# EAGLE board USB-C_PURE_v1 (EAGLE 9.7.0)

Size 60.4 x 149.8 mm. Coordinates in mm from the lower left corner, seen from the top.
Outline: 29.53,79.07 29.53,79.53 29.98,79.53 29.98,79.07 29.53,79.07
Outline: 30.62,79.07 30.62,79.53 31.08,79.53 31.08,79.07 30.62,79.07
Outline: 31.73,79.07 31.73,79.53 32.18,79.53 32.18,79.07 31.73,79.07
Outline: 53.8,84.6 53.8,86 56,86 56,84.6 53.8,84.6
Outline: 32.85,79.07 32.85,79.53 33.45,79.53 33.45,79.07 32.85,79.07
Outline: 27.15,79.07 27.15,79.53 27.75,79.53 27.75,79.07 27.15,79.07
Outline: 53.8,61.7 53.8,63.1 56,63.1 56,61.7 53.8,61.7
Outline: 38.7,63.27 38.7,63.72 39.16,63.72 39.16,63.27 38.7,63.27
Outline: 34.13,63.27 34.13,63.72 34.73,63.72 34.73,63.27 34.13,63.27
Outline: 39.83,61.87 39.83,62.32 40.43,62.32 40.43,61.87 39.83,61.87
Outline: 37.61,63.27 37.61,63.72 38.05,63.72 38.05,63.27 37.61,63.27
Outline: 41.08,61.87 41.08,62.32 41.68,62.32 41.68,61.87 41.08,61.87
Outline: 37.78,54.71 37.78,55.31 38.78,55.31 38.78,54.71 37.78,54.71
Outline: 39.83,63.27 39.83,63.72 40.43,63.72 40.43,63.27 39.83,63.27
Outline: 33.18,54.71 33.18,55.31 34.38,55.31 34.38,54.71 33.18,54.71
Outline: 32.88,61.87 32.88,62.32 33.48,62.32 33.48,61.87 32.88,61.87
Outline: 30.58,57.47 30.58,59.32 31.18,59.32 31.18,57.47 30.58,57.47
Outline: 36.51,63.27 36.51,63.72 36.95,63.72 36.95,63.27 36.51,63.27
Outline: 40.18,54.71 40.18,55.31 41.38,55.31 41.38,54.71 40.18,54.71
Outline: 37.61,61.87 37.61,62.32 38.05,62.32 38.05,61.87 37.61,61.87
Outline: 35.41,61.87 35.41,62.32 35.86,62.32 35.86,61.87 35.41,61.87
Outline: 41.08,63.27 41.08,63.72 41.68,63.72 41.68,63.27 41.08,63.27
Outline: 35.78,54.71 35.78,55.31 36.78,55.31 36.78,54.71 35.78,54.71
Outline: 36.4,73.28 36.4,75.12 37,75.12 37,73.28 36.4,73.28
Outline: 34.13,61.87 34.13,62.32 34.73,62.32 34.73,61.87 34.13,61.87
Outline: 36.51,61.87 36.51,62.32 36.95,62.32 36.95,61.87 36.51,61.87
Outline: 43.38,57.47 43.38,59.32 43.98,59.32 43.98,57.47 43.38,57.47
Outline: 34.1,79.07 34.1,79.53 34.7,79.53 34.7,79.07 34.1,79.07
Outline: 26.2,70.52 26.2,71.12 27.4,71.12 27.4,70.52 26.2,70.52
Outline: 25.9,77.67 25.9,78.12 26.5,78.12 26.5,77.67 25.9,77.67
Outline: 30.8,70.52 30.8,71.12 31.8,71.12 31.8,70.52 30.8,70.52
Outline: 23.6,73.28 23.6,75.12 24.2,75.12 24.2,73.28 23.6,73.28
Outline: 28.8,70.52 28.8,71.12 29.8,71.12 29.8,70.52 28.8,70.52
Outline: 33.2,70.52 33.2,71.12 34.4,71.12 34.4,70.52 33.2,70.52
Outline: 32.88,63.27 32.88,63.72 33.48,63.72 33.48,63.27 32.88,63.27
Outline: 25.9,79.07 25.9,79.53 26.5,79.53 26.5,79.07 25.9,79.07
Outline: 32.85,77.67 32.85,78.12 33.45,78.12 33.45,77.67 32.85,77.67
Outline: 34.1,77.67 34.1,78.12 34.7,78.12 34.7,77.67 34.1,77.67
Outline: 28.43,77.67 28.43,78.12 28.88,78.12 28.88,77.67 28.43,77.67
Outline: 30.62,77.67 30.62,78.12 31.08,78.12 31.08,77.67 30.62,77.67
Outline: 27.15,77.67 27.15,78.12 27.75,78.12 27.75,77.67 27.15,77.67
Outline: 29.53,77.67 29.53,78.12 29.98,78.12 29.98,77.67 29.53,77.67
Outline: 0.4,119.8 0,30 arc180 60,30 60.4,119.8 arc180 0.4,119.8
Outline: circle at 30.1,12.2 radius 1.4
Outline: circle at 30.1,139.2 radius 1.4
Copper layers (1*16): Top 0.035mm / dielectric 1.5mm / Bottom 0.035mm
Design rules "default": minimum track width 6mil, minimum drill 0.35mm, track to track 6mil, track to pad 6mil, pad to pad 6mil, via to via 6mil, smd to smd 6mil, copper to edge 40mil, drill to drill 6mil, minimum pad ring 10mil, minimum via ring 8mil, stop-mask expansion 4mil, vias tented up to drill 0mil, thermal gap 10mil
Net classes: 1 power: width 0.305 mm, drill 0.483 mm, clearance 0.203 mm; 2 gnd: width 0.305 mm, drill 0.483 mm, clearance 0.203 mm; 3 usbvcc: width 0.305 mm, drill 0.483 mm, clearance 0.203 mm; 4 aref: width 0.254 mm, drill 0.483 mm, clearance 0.203 mm

## Footprints (pad centres in the part's own frame; a part is rotated, then mirrored left to right if it is on the bottom)
54 = drill 1.83 pad 2.75: 1 3.3,2.54; 2 3.3,-2.54; 3 -4.32,0; 4 46.77,-2.54; 5 46.77,2.54; 6 54.39,0
254TR = drill 1.85 pad 4.24: 1 0,0 | drill 1.85 pad 5.2: 2 16,0
CAPC2012X110 = smd 1.165 x 1.465: 1 -0.875,0; 2 0.875,0
CAPC1005X60 = smd 0.56 x 0.629: 1 -0.485,0; 2 0.485,0
CAP_16SVPG270M = smd 3.5 x 1.6: 1 -2.8,0; 2 2.8,0
LEDC2012X105N_RND-R = smd 0.862 x 1.362: A 0.975,0; C -0.975,0
DPY2_TEX = smd 0.3 x 0.55: 1 -0.35,0; 2 0.35,0
SMA_DIO = smd 2.18 x 1.63: 1 -1.857,0; 2 1.857,0
2X3-NS = drill 1.016 pad 1.88: 1 -2.54,-1.27; 2 -2.54,1.27; 3 0,-1.27; 4 0,1.27; 5 2.54,-1.27; 6 2.54,1.27
ADAMTECH_USB-C31-A-D-VT-CS1 = drill 0.45 pad 0.85 square: CC1 -1.65,5.1; CC2 1.65,3.7; D+_A -0.55,5.1; D+_B 0.55,3.7; D-_A 0.55,5.1; D-_B -0.55,3.7 | drill 0.6 pad 0.9 long: D+ 1,-3.38; D- -1,-3.38 | drill 0.6 pad 1.05 long: G 3.5,-3.38; V -3.5,-3.38 | drill 0.45 pad 1 square: G_A1 -4.1,5.1; G_A2 4.1,5.1; G_B1 4.1,3.7; G_B2 -4.1,3.7; V_A1 -2.85,5.1; V_A2 2.85,5.1; V_B1 2.85,3.7; V_B2 -2.85,3.7 | drill 0.6 pad 1.25 long: S1 -6.4,0; S2 6.4,0
SAMTEC-SLW-104-01-X-S = drill 0.86 pad 1.46: 1 -3.81,0; 2 -1.27,0; 3 1.27,0; 4 3.81,0
DR1050 = smd 3.302 x 3.302: 1 -5.309,0; 2 5.309,0
AA2810 = smd 1.27 x 0.635: + -1.27,0; - 1.27,0
EAPL3809WA1 = smd 0.635 x 1.27: + 0,0; - 3.81,0
STANDOFF_HEX_MALE-FEMALE_550X1200_M3X0.5_MTGP850H320 = drill 3.2 pad 8.5: 1 0,0 | hole 3.2: 0,0
SOT96P240X120-3N = smd 1.2 x 0.65: 1 -1.05,0.96; 2 -1.05,-0.96; 3 1.05,0
SOIC127P600X175-8N = smd 1.525 x 0.7: 1 -2.712,1.905; 2 -2.712,0.635; 3 -2.712,-0.635; 4 -2.712,-1.905; 5 2.712,-1.905; 6 2.712,-0.635; 7 2.712,0.635; 8 2.712,1.905
RESC1005X40 = smd 0.535 x 0.644: 1 -0.507,0; 2 0.507,0
BTN_KMR2_4.6X2.8 = smd 0.9 x 1: A 2.05,0.8; A' -2.05,0.8; B 2.05,-0.8; B' -2.05,-0.8
THRMC1608X60N = smd 0.799 x 0.974: 1 -0.815,0; 2 0.815,0
PAD.03X.03 = smd 0.762 x 0.762: P$1 0,0
1X07 = drill 1.016 long: 1 -7.62,0; 2 -5.08,0; 3 -2.54,0; 4 0,0; 5 2.54,0; 6 5.08,0; 7 7.62,0
MP2639AGRZ = smd 1.8 x 0.3: 1 -1.4,1.1; 2 -1.4,0.55; 3 -1.4,0; 4 -1.4,-0.55; 5 -1.4,-1.1 | smd 0.3 x 0.7: 6 -1.3,-1.95; 12 1.3,-1.95; 20 1.3,1.95; 26 -1.3,1.95 | smd 0.2 x 0.7: 7 -0.8,-1.95; 8 -0.4,-1.95; 9 0,-1.95; 10 0.4,-1.95; 11 0.8,-1.95; 21 0.8,1.95; 22 0.4,1.95; 23 0,1.95; 24 -0.4,1.95; 25 -0.8,1.95 | smd 1.05 x 0.2: 13 1.775,-1.2; 14 1.775,-0.8; 15 1.775,-0.4; 16 1.775,0; 17 1.775,0.4; 18 1.775,0.8; 19 1.775,1.2
MLF32-TH = smd 0.7 x 0.25: 1 -2.35,1.75; 2 -2.35,1.25; 3 -2.35,0.75; 4 -2.35,0.25; 5 -2.35,-0.25; 6 -2.35,-0.75; 7 -2.35,-1.25; 8 -2.35,-1.75; 17 2.35,-1.75; 18 2.35,-1.25; 19 2.35,-0.75; 20 2.35,-0.25; 21 2.35,0.25; 22 2.35,0.75; 23 2.35,1.25; 24 2.35,1.75 | smd 0.25 x 0.7: 9 -1.75,-2.35; 10 -1.25,-2.35; 11 -0.75,-2.35; 12 -0.25,-2.35; 13 0.25,-2.35; 14 0.75,-2.35; 15 1.25,-2.35; 16 1.75,-2.35; 25 1.75,2.35; 26 1.25,2.35; 27 0.75,2.35; 28 0.25,2.35; 29 -0.25,2.35; 30 -0.75,2.35; 31 -1.25,2.35; 32 -1.75,2.35 | smd 3.2 x 3.2: TH 0,0
DBV6_TEX = smd 0.978 x 0.559: 1 -1.365,0.95; 2 -1.365,0; 3 -1.365,-0.95; 4 1.365,-0.95; 5 1.365,0; 6 1.365,0.95
SOT-25_TOR = smd 0.927 x 0.432: 1 -1.289,0.95; 2 -1.289,0; 3 -1.289,-0.95; 4 1.289,-0.95; 5 1.289,0.95
DMX3_TEX = smd 0.25 x 0.453: 1 0,0.252; 2 -0.34,-0.252; 3 0.34,-0.252
21-100355_MXM = smd 0.25 x 0.25: A1 -1.5,1.5; A2 -1,1.5; A3 -0.5,1.5; A4 0,1.5; A5 0.5,1.5; A6 1,1.5; A7 1.5,1.5; B1 -1.5,1; B2 -1,1; B3 -0.5,1; B4 0,1; B5 0.5,1; B6 1,1; B7 1.5,1; C1 -1.5,0.5; C2 -1,0.5; C3 -0.5,0.5; C4 0,0.5; C5 0.5,0.5; C6 1,0.5; C7 1.5,0.5; D1 -1.5,0; D2 -1,0; D3 -0.5,0; D4 0,0; D5 0.5,0; D6 1,0; D7 1.5,0; E1 -1.5,-0.5; E2 -1,-0.5; E3 -0.5,-0.5; E4 0,-0.5; E5 0.5,-0.5; E6 1,-0.5; E7 1.5,-0.5; F1 -1.5,-1; F2 -1,-1; F3 -0.5,-1; F4 0,-1; F5 0.5,-1; F6 1,-1; F7 1.5,-1; G1 -1.5,-1.5; G2 -1,-1.5; G3 -0.5,-1.5; G4 0,-1.5; G5 0.5,-1.5; G6 1,-1.5; G7 1.5,-1.5
OSC_CSTNE16M0V530000R0 = smd 0.4 x 1.9: 1 -1.2,0; 2 0,0; 3 1.2,0

## Placement (x,y rotation side)
BT1  54  [54]  26.5,11.6 90 top
BT2  54  [54]  26.3,88.5 90 top
BT3  54  [54]  47.8,83.5 90 top
BT4  54  [54]  47.9,15.1 90 top
BT5  254TR  [254TR]  82.2,105.7 0 top  (outside the outline)
BT6  254TR  [254TR]  82.2,86.9 0 top  (outside the outline)
BT7  254TR  [254TR]  82.2,68.1 0 top  (outside the outline)
BT8  254TR  [254TR]  82.2,49.3 0 top  (outside the outline)
BT9  254TR  [254TR]  82.2,30.5 0 top  (outside the outline)
BT10  254TR  [254TR]  82.2,11.7 0 top  (outside the outline)
BT11  254TR  [254TR]  95.3,0 270 top  (outside the outline)
BT12  254TR  [254TR]  82.2,-25.9 0 top  (outside the outline)
C1  1uF  [CAPC2012X110]  28.2,100.2 0 top
C2  22uF  [CAPC2012X110]  31.1,110.2 0 top
C3  22uF  [CAPC2012X110]  31,104.9 0 top
C4  1uF  [CAPC2012X110]  30.52,53.37 0 bottom
C5  22uF  [CAPC2012X110]  42.7,74 270 bottom
C6  22uF  [CAPC2012X110]  12.2,56.1 0 top
C7  22uF  [CAPC2012X110]  24.4,96 0 top
C8  100nF  [CAPC1005X60]  38.6,119 0 bottom
C9  1uF  [CAPC2012X110]  31.1,114.7 0 top
C11  33pF  [CAPC1005X60]  32.3,124.2 180 bottom
C12  CNTC  [CAPC1005X60]  32.3,128.4 180 bottom
C14  22uF  [CAPC2012X110]  45.9,125.4 0 top
C15  22uF  [CAPC2012X110]  45.9,121 0 top
C17  1uF  [CAPC2012X110]  31.7,34.7 0 top
C18  100nF  [CAPC1005X60]  13.7,70.1 180 bottom
C19  100nF  [CAPC1005X60]  9.4,74.4 180 bottom
C21  1uF  [CAPC2012X110]  44.33,77.22 90 bottom
C23  100nF  [CAPC1005X60]  14.2,78.4 180 bottom
C24  100nF  [CAPC1005X60]  15.7,70.1 180 bottom
C52  270uF  [CAP_16SVPG270M]  12.7,49.4 180 top
CIB  33pF  [CAPC1005X60]  34.2,129.7 270 bottom
CTMR  1uF  [CAPC2012X110]  35.9,118.1 90 bottom
D1  LED_RED  [LEDC2012X105N_RND-R]  14.1,123.6 90 top
D2  TPD1E10B06QDPYRQ1DPY2_TEX  [DPY2_TEX]  20.8,78.7 90 bottom
D3  TPD1E10B06QDPYRQ1DPY2_TEX  [DPY2_TEX]  30.7,73 180 top
D4  B330A-13SMA_DIO  [SMA_DIO]  44.2,132.1 0 bottom
ISP  AVR_SPI_PROG_3X2NS  [2X3-NS]  14.1,128.6 0 top
J1  USB-C31-A-D-VT-CS1  [ADAMTECH_USB-C31-A-D-VT-CS1]  30.3,74.2 0 bottom
J4  SAMTEC-SLW-104-01-X-SJ  [SAMTEC-SLW-104-01-X-S]  1.18,67.35 270 top
J5  SAMTEC-SLW-104-01-X-SJ  [SAMTEC-SLW-104-01-X-S]  1.23,81.3 270 top
J7  SAMTEC-SLW-104-01-X-SJ  [SAMTEC-SLW-104-01-X-S]  1.13,53.5 270 top
J8  SAMTEC-SLW-104-01-X-SJ  [SAMTEC-SLW-104-01-X-S]  1.28,95.3 270 top
L1  DR1050-2R2-RDR1050  [DR1050]  46,122.8 90 bottom
LED1  AA2810  [AA2810]  58.98,96.38 90 bottom
LED2  EAPL3809WA1  [EAPL3809WA1]  58.61,79.65 90 bottom
LED3  EAPL3809WA1  [EAPL3809WA1]  58.45,65.57 90 bottom
LED4  EAPL3809WA1  [EAPL3809WA1]  58.45,51.8 90 bottom
MP2  STANDOFF_M/F_M3_12MM  [STANDOFF_HEX_MALE-FEMALE_550X1200_M3X0.5_MTGP850H320]  11.9,108.9 0 top
MP3  STANDOFF_M/F_M3_12MM  [STANDOFF_HEX_MALE-FEMALE_550X1200_M3X0.5_MTGP850H320]  11.9,40.1 0 top
MP4  STANDOFF_M/F_M3_12MM  [STANDOFF_HEX_MALE-FEMALE_550X1200_M3X0.5_MTGP850H320]  48.3,108.9 0 top
MP5  STANDOFF_M/F_M3_12MM  [STANDOFF_HEX_MALE-FEMALE_550X1200_M3X0.5_MTGP850H320]  48.3,40.1 0 top
Q1  2N7002-7-F  [SOT96P240X120-3N]  32.6,95.8 0 top
Q2  AM4825PE  [SOIC127P600X175-8N]  31.8,102.5 90 bottom
R1  5.1K  [RESC1005X40]  54.89,85.32 0 top
R2  5.1K  [RESC1005X40]  54.94,62.33 180 top
R3  100  [RESC1005X40]  23.8,102.8 180 top
R4  2K  [RESC1005X40]  30.63,94.59 0 bottom
R5  93.1K  [RESC1005X40]  33.8,98.5 0 top
R6  200  [RESC1005X40]  40.4,73.9 90 bottom
R7  24.3K  [RESC1005X40]  32.3,121.5 180 bottom
R8  76.8K  [RESC1005X40]  32.3,122.8 0 bottom
R9  27.4K  [RESC1005X40]  32.3,125.6 0 bottom
R10  10K  [RESC1005X40]  32.3,126.9 180 bottom
R11  10K  [RESC1005X40]  34.2,127.8 90 bottom
R16  [RESC1005X40]  53.5,97.9 0 bottom
R17  [RESC1005X40]  58.6,86.4 270 bottom
R18  [RESC1005X40]  58.5,72.1 270 bottom
R19  [RESC1005X40]  58.4,58.8 270 bottom
R20  1k  [RESC1005X40]  14.1,120.7 270 top
R21  4.7K  [RESC1005X40]  9.4,71.8 180 bottom
R22  4.7K  [RESC1005X40]  9.4,73.1 180 bottom
R23  10k  [RESC1005X40]  12.2,78.4 180 bottom
RESET  KMR2  [BTN_KMR2_4.6X2.8]  24,128.7 0 top
RIB  40.2K  [RESC1005X40]  35.5,127.8 90 bottom
RILIM  432K  [RESC1005X40]  39.4,127.8 90 bottom
RISET  86.6K  [RESC1005X40]  38.1,127.8 90 bottom
RNTC1  10K NTC  [THRMC1608X60N]  29.4,45.6 270 top
RNTC2  15K NTC  [THRMC1608X60N]  13.9,67.5 270 top
ROLIM  44.2K  [RESC1005X40]  36.8,127.8 90 bottom
TP1  TEST-POINT3  [PAD.03X.03]  14.2,68.3 0 bottom
TPR54  PINHD-1X7  [1X07]  30.1,8.1 180 top
U1  MP2639AGR-Z  [MP2639AGRZ]  36.69,123.67 0 bottom
U2  ATMEGA328P  [MLF32-TH]  13.9,74.1 270 bottom
U3  TPS2514AQDBVTQ1DBV6_TEX  [DBV6_TEX]  50.4,51.5 0 top
U4  XC6209F332MR-GSOT-25_TOR  [SOT-25_TOR]  31.8,40.3 90 top
U5  ESD122DMXRDMX3_TEX  [DMX3_TEX]  30.58,90.89 0 bottom
U6  ESD122DMXRDMX3_TEX  [DMX3_TEX]  30.7,69.2 180 top
U7  MAX77962EWJ06+21-100355_MXM  [21-100355_MXM]  -16.9,-61.7 0 top  (outside the outline)
Y1  CSTNE16M0V530000R0  [OSC_CSTNE16M0V530000R0]  16.9,79 90 bottom

## Library data of the parts
BT1-BT4 = 54; DESCRIPTION: Cylindrical Battery Contacts, Clips, Holders & Springs 16-19mm PC BATTERY CLIP; HEIGHT: mm; MANUFACTURER_NAME: Keystone Electronics; MANUFACTURER_PART_NUMBER: 54; MOUSER_PART_NUMBER: 534-54; MOUSER_PRICE-STOCK: https://www.mouser.co.uk/ProductDetail/Keystone-Electronics/54?qs=73q%2FgRcW4F3NakoJDesViw%3D%3D
BT5-BT12 = 254TR; DESCRIPTION: Keystone Electronics BATTERY HOLDER ON TAPE AND REEL; HEIGHT: 16.97mm; MANUFACTURER_NAME: Keystone Electronics; MANUFACTURER_PART_NUMBER: 254TR; MOUSER_PART_NUMBER: 534-254TR; MOUSER_PRICE-STOCK: https://www.mouser.co.uk/ProductDetail/Keystone-Electronics/254TR?qs=u16ybLDytRapOGIb7D1Ytg%3D%3D
C1-C9 C11 C12 C14 C15 C17-C19 C21 C23 C24 CIB CTMR = Capacitor; CATEGORY: Capacitor
C52 = 16SVPG270M; MANUFACTURER: Panasonic; MAXIMUM_PACKAGE_HEIGHT: 9.9mm; PARTREV: 05-Mar-21; STANDARD: Manufacturer Recommendations
D1 = LED; CATEGORY: LED; COLOR: RED; DESCRIPTION: CHIP LED ROUND; SUB-CATEGORY: CHIP; TYPE: ROUND_TOP
D2 D3 = TPD1E10B06QDPYRQ1; COPYRIGHT: Copyright (C) 2022 Ultra Librarian. All rights reserved.; DIGI-KEY_PART_NUMBER_1: 296-45327-1-ND; DIGI-KEY_PART_NUMBER_2: 296-45327-2-ND; DIGI-KEY_PART_NUMBER_3: 296-45327-6-ND; DIGI-KEY_PART_NUMBER_4: 296-TPD1E10B06QDPYRQ1CT-ND; DIGI-KEY_PART_NUMBER_5: 296-TPD1E10B06QDPYRQ1DKR-ND; DIGI-KEY_PART_NUMBER_6: 296-TPD1E10B06QDPYRQ1TR-ND; MANUFACTURER_PART_NUMBER: TPD1E10B06QDPYRQ1; MFR_NAME: Texas Instruments
D4 = B330A-13; COPYRIGHT: Copyright (C) 2022 Ultra Librarian. All rights reserved.; MANUFACTURER_PART_NUMBER: B330A-13; MFR_NAME: Diodes Inc
ISP TP1 = SparkFun-Connectors
J1 = USB-C31-A-D-VT-CS1; DESCRIPTION: USB-A (USB TYPE-A) and USB-C (USB TYPE-C), Stacked USB 2.0, USB 3.2 Gen 2 (USB 3.1 Gen 2, Superspeed+ (USB 3.1)) Receptacle Connector 28 Position Through Hole; DIGI-KEY_PART_NUMBER: 2057-USB-C31-A-D-VT-CS1-ND; MF: Adam Tech; MP: USB-C31-A-D-VT-CS1; PACKAGE: None; PURCHASE-URL: https://pricing.snapeda.com/search/part/USB-C31-A-D-VT-CS1/?ref=eda
J4 J5 J7 J8 = SAMTEC-SLW-104-01-X-S
L1 = DR1050-2R2-R; COPYRIGHT: Copyright (C) 2022 Ultra Librarian. All rights reserved.; DIGI-KEY_PART_NUMBER_1: 513-1412-1-ND; DIGI-KEY_PART_NUMBER_2: 513-1412-2-ND; DIGI-KEY_PART_NUMBER_3: 513-1412-6-ND; MANUFACTURER_PART_NUMBER: DR1050-2R2-R; MFR_NAME: Eaton
LED1 = AA2810ASURSK
LED2-LED4 = EAPL3809WA1
MP2-MP5 = PCB-Fasteners_Hardware; CATEGORY: Standoff/Spacer; SUB-CATEGORY: Male-Female
Q1 = 2N7002-7-F; ARROW_PART_NUMBER: 2N7002-7-F; ARROW_PRICE-STOCK: https://www.arrow.com/en/products/2n7002-7-f/diodes-incorporated?region=nac; DESCRIPTION: MOSFET N-Channel 60V 0.21A SOT23 Diodes Inc 2N7002-7-F N-channel MOSFET Transistor, 0.115 A, 60 V, 3-Pin SOT-23; HEIGHT: 1.2mm; MANUFACTURER_NAME: Diodes Inc.; MANUFACTURER_PART_NUMBER: 2N7002-7-F; MOUSER_PART_NUMBER: 621-2N7002-F; MOUSER_PRICE-STOCK: https://www.mouser.co.uk/ProductDetail/Diodes-Incorporated/2N7002-7-F?qs=jMXWnm70%252BC%252BAX%252BMLzUkTZg%3D%3D
Q2 = AM4825PE; DESCRIPTION: P-Channel 20-V (D-S) MOSFET; HEIGHT: 1.75mm; MANUFACTURER_NAME: Analog Power; MANUFACTURER_PART_NUMBER: AM4825PE
R1-R11 R16-R23 RIB RILIM RISET ROLIM = Resistor; CATEGORY: Resistor; SUB-CATEGORY: Fixed
RESET U2 = microbuilder
RNTC1 RNTC2 = Sensor; CATEGORY: Sensor; DESCRIPTION: THERM NTC 470KOHM 4500K 0603; MANUFACTURER: Murata Electronics; MPN: NCP18WM474J03RB; PART_STATUS: Active; SUB-CATEGORY: Temperature
TPR54 = Connector; CATEGORY: CONNECTOR; SUB-CATEGORY: PIN-HEADER
U1 = MP2639AGR-Z; DESCRIPTION: Battery Management 2-Cell 2.5A Li-ion or Li-polymer Switching Charger Integrated Bidirectional Charge/Discharge; HEIGHT: 1mm; MANUFACTURER_NAME: Monolithic Power Systems (MPS); MANUFACTURER_PART_NUMBER: MP2639AGR-Z; MOUSER_PART_NUMBER: 946-MP2639AGR-Z; MOUSER_PRICE-STOCK: https://www.mouser.co.uk/ProductDetail/Monolithic-Power-Systems-MPS/MP2639AGR-Z?qs=YCa%2FAAYMW004W5DDRZSXeQ%3D%3D
U3 = TPS2514AQDBVTQ1; COPYRIGHT: Copyright (C) 2022 Ultra Librarian. All rights reserved.; DIGI-KEY_PART_NUMBER_1: 2156-TPS2514AQDBVTQ1-ND; DIGI-KEY_PART_NUMBER_2: 296-TPS2514AQDBVTQ1CT-ND; DIGI-KEY_PART_NUMBER_3: 296-TPS2514AQDBVTQ1DKR-ND; DIGI-KEY_PART_NUMBER_4: 296-TPS2514AQDBVTQ1TR-ND; DIGI-KEY_PART_NUMBER_5: TPS2514AQDBVTQ1-ND; MANUFACTURER_PART_NUMBER: TPS2514AQDBVTQ1; MFR_NAME: Texas Instruments
U4 = XC6209F332MR; COPYRIGHT: Copyright (C) 2022 Ultra Librarian. All rights reserved.; DIGI-KEY_PART_NUMBER_1: 893-1070-1-ND; DIGI-KEY_PART_NUMBER_2: 893-1070-2-ND; DIGI-KEY_PART_NUMBER_3: 893-1070-6-ND; MANUFACTURER_PART_NUMBER: XC6209F332MR-G; MFR_NAME: Torex Semiconductor
U5 U6 = ESD122DMXR; COPYRIGHT: Copyright (C) 2022 Ultra Librarian. All rights reserved.; DIGI-KEY_PART_NUMBER_1: 296-48543-1-ND; DIGI-KEY_PART_NUMBER_2: 296-48543-2-ND; DIGI-KEY_PART_NUMBER_3: 296-48543-6-ND; DIGI-KEY_PART_NUMBER_4: ESD122DMXR-ND; MANUFACTURER_PART_NUMBER: ESD122DMXR; MFR_NAME: Texas Instruments
U7 = MAX77962EWJ06; COPYRIGHT: Copyright (C) 2022 Ultra Librarian. All rights reserved.; MANUFACTURER_PART_NUMBER: MAX77962EWJ06+; MFR_NAME: Maxim Integrated Products
Y1 = CSTNE16M0V530000R0; DESCRIPTION: 16 MHz Ceramic Resonator Built in Capacitor 15 pF ±0.3% 40 Ohms -40°C ~ 85°C Surface Mount; DIGI-KEY_PART_NUMBER: 490-17948-1-ND; MF: Murata Electronics; MP: CSTNE16M0V530000R0; PACKAGE: SMD-3 Murata; PURCHASE-URL: https://pricing.snapeda.com/search/part/CSTNE16M0V530000R0/?ref=eda

## Nets
+3.3V [usbvcc]: C23.1 C24.1 ISP.2 R21.1 R22.1 R23.2 TPR54.4 U2.4 U2.6 U2.18
+5V: C2.1 C3.1 C4.1 C5.1 C6.1 C11.1 C52.1 D3.1 J1.V Q2.1 Q2.2 Q2.3 R8.2 R9.2 U1.1 U3.5
ACOK: R6.2 U1.25 U2.1
AD0: U2.23
AD1: U2.24
AD2: U2.25
AD3: U2.26
AREF [aref]: C18.2 TP1.P$1 U2.20
CC1: J1.CC1 R1.2
CC2: J1.CC2 R2.2
CHG: U1.26
D+: J1.D+_A U5.2
D-: J1.D-_A U5.3
DM: J1.D- U3.6 U6.2
DP: J1.D+ U3.1 U6.3
DTR: C19.1
DVDD: J4.4
EN/DVDD: J4.3
GND: C1.2 C2.2 C3.2 C4.2 C5.2 C6.2 C7.2 C9.2 C12.1 C14.2 C15.2 C17.2 C18.1 C21.2 C23.2 C24.2 C52.2 CIB.1 CTMR.1 D2.2 D3.2 D4.2 ISP.6 J1.G J1.G_A1 J1.G_A2 J1.G_B1 J1.G_B2 J1.S1 J1.S2 J8.1 J8.2 J8.3 J8.4 Q1.2 R1.1 R2.1 R4.1 R7.1 R10.1 R20.2 RESET.A RESET.A' RIB.2 RILIM.2 RISET.2 RNTC2.2 ROLIM.2 TPR54.3 U1.5 U1.10 U2.3 U2.5 U2.21 U2.TH U3.2 U4.2 U5.1 U6.1 U7.D6 Y1.2
GND_2: U7.C5
GND_3: U7.C6
GND_4: U7.C7
ILIM: R5.2
IO2: TPR54.6 U2.32
IO4: TPR54.1 U2.2
IO5: TPR54.2 U2.9
IO6: TPR54.5 U2.10
IO7: TPR54.7 U2.11
IO9: U2.13
LED1: R16.1 U1.13
LED2: R17.1 U1.14
LED3: R18.1 U1.15
LED4: R19.1 U1.16
MISO: ISP.1 U2.16
MODE: U1.8
MOSI: ISP.4 U2.15
N$1: Q2.4 R6.1
N$2: BT1.4 BT1.5 BT1.6 BT2.1 BT2.2 BT2.3
N$3: Q1.3 R5.1
N$4: BT3.4 BT3.5 BT3.6 BT4.1 BT4.2 BT4.3
N$5: LED2.- R17.2
N$6: LED1.- R16.2
N$7: C8.1 L1.1 U1.4
N$8: D4.1 L1.2 U1.2
N$9: C8.2 U1.6
N$10: CTMR.2 U1.11
N$11: C11.2 R7.2 R8.1 U1.17
N$12: R9.1 R10.2 U1.18
N$13: RNTC1.2 RNTC2.1 U1.20
N$14: C12.2 RNTC1.1 U1.19
N$15: RILIM.1 U1.24
N$16: RISET.1 U1.23
N$17: ROLIM.1 U1.22
N$18: CIB.2 R11.2
N$19: R11.1 RIB.1 U1.21
N$20: LED3.- R18.2
N$21: LED4.- R19.2
N$22: D1.C R20.1
N$23: BT2.4 BT2.5 BT2.6 BT4.4 BT4.5 BT4.6
N$24: C21.1 U4.5
N$25: C1.1 J1.D+_B R3.2
N$26: J1.D-_B Q1.1 R4.2
PB: U1.7
PDN: J5.1
PGND: U7.D4
PGND_2: U7.D1
PGND_3: U7.D2
PGND_4: U7.D3
RESET: C19.2 ISP.5 R23.1 RESET.B RESET.B' U2.29
RXD: J4.2 U2.30
SCK: D1.A ISP.3 U2.17
SCL: J5.2 R22.2 U2.28
SDA: J5.3 R21.2 U2.27
SS: U2.14
TXD: J4.1 U2.31
VCC: C9.1 LED1.+ LED2.+ LED3.+ LED4.+ U1.9
VH: BT1.1 BT1.2 BT1.3 BT3.1 BT3.2 BT3.3 C14.1 C15.1 C17.1 J7.1 J7.2 J7.3 J7.4 U1.3 U4.1 U4.3
VIN: C7.1 D2.1 J1.V_A1 J1.V_A2 J1.V_B1 J1.V_B2 Q2.5 Q2.6 Q2.7 Q2.8 R3.1
VREG_IN: J5.4 U2.12
XTAL1: U2.7 Y1.3
XTAL2: U2.8 Y1.1

## Tracks (layer width: path | path; a pad name or v marks a point on that pad's centre or on a via)
+3.3V  (9 unrouted)
+5V  (15 unrouted)
ACOK  (2 unrouted)
AREF  (2 unrouted)
CC1  (1 unrouted)
CC2  (1 unrouted)
D+  (1 unrouted)
D-  (1 unrouted)
DM  (2 unrouted)
DP  (2 unrouted)
GND  (60 unrouted)
IO2  (1 unrouted)
IO4  (1 unrouted)
IO5  (1 unrouted)
IO6  (1 unrouted)
IO7  (1 unrouted)
LED1  (1 unrouted)
LED2  (1 unrouted)
LED3  (1 unrouted)
LED4  (1 unrouted)
MISO  (1 unrouted)
MOSI  (1 unrouted)
N$1  (1 unrouted)
N$2  (5 unrouted)
N$3  (1 unrouted)
N$4  (5 unrouted)
N$5  (1 unrouted)
N$6  (1 unrouted)
N$7  (2 unrouted)
N$8  (2 unrouted)
N$9  (1 unrouted)
N$10  (1 unrouted)
N$11  (3 unrouted)
N$12  (2 unrouted)
N$13  (2 unrouted)
N$14  (2 unrouted)
N$15  (1 unrouted)
N$16  (1 unrouted)
N$17  (1 unrouted)
N$18  (1 unrouted)
N$19  (2 unrouted)
N$20  (1 unrouted)
N$21  (1 unrouted)
N$22  (1 unrouted)
N$23  (5 unrouted)
N$24  (1 unrouted)
N$25  (2 unrouted)
N$26  (2 unrouted)
RESET  (5 unrouted)
RXD  (1 unrouted)
SCK  (2 unrouted)
SCL  (2 unrouted)
SDA  (2 unrouted)
TXD  (1 unrouted)
VCC  (5 unrouted)
VH  (15 unrouted)
VIN  (10 unrouted)
VREG_IN  (1 unrouted)
XTAL1  (1 unrouted)
XTAL2  (1 unrouted)

## Text on the board
tPlace: ISP
tNames: TOP | _ | + | + | _ | _ | + | TPR54 | IO3 | IO2 | IO1 | 3V3 | G | IO5 | IO4
bNames: GND | 25% | VREG | PDN | SCL | 50% | SDA | TX | RX | EN/DVDD | 75% | DVDD | VBAT | 10\0%